# Altium PCB OSPLC2_2_IO.PcbDoc (part 1 of 2)
Units mm, origin at the board's own origin, x right, y up, seen from the top; angles counter-clockwise.
Board outline 156 x 86.5 mm, 2 copper layers (Top Layer, Bottom Layer); 296 components, 258 nets, 890 pads, 194 vias.
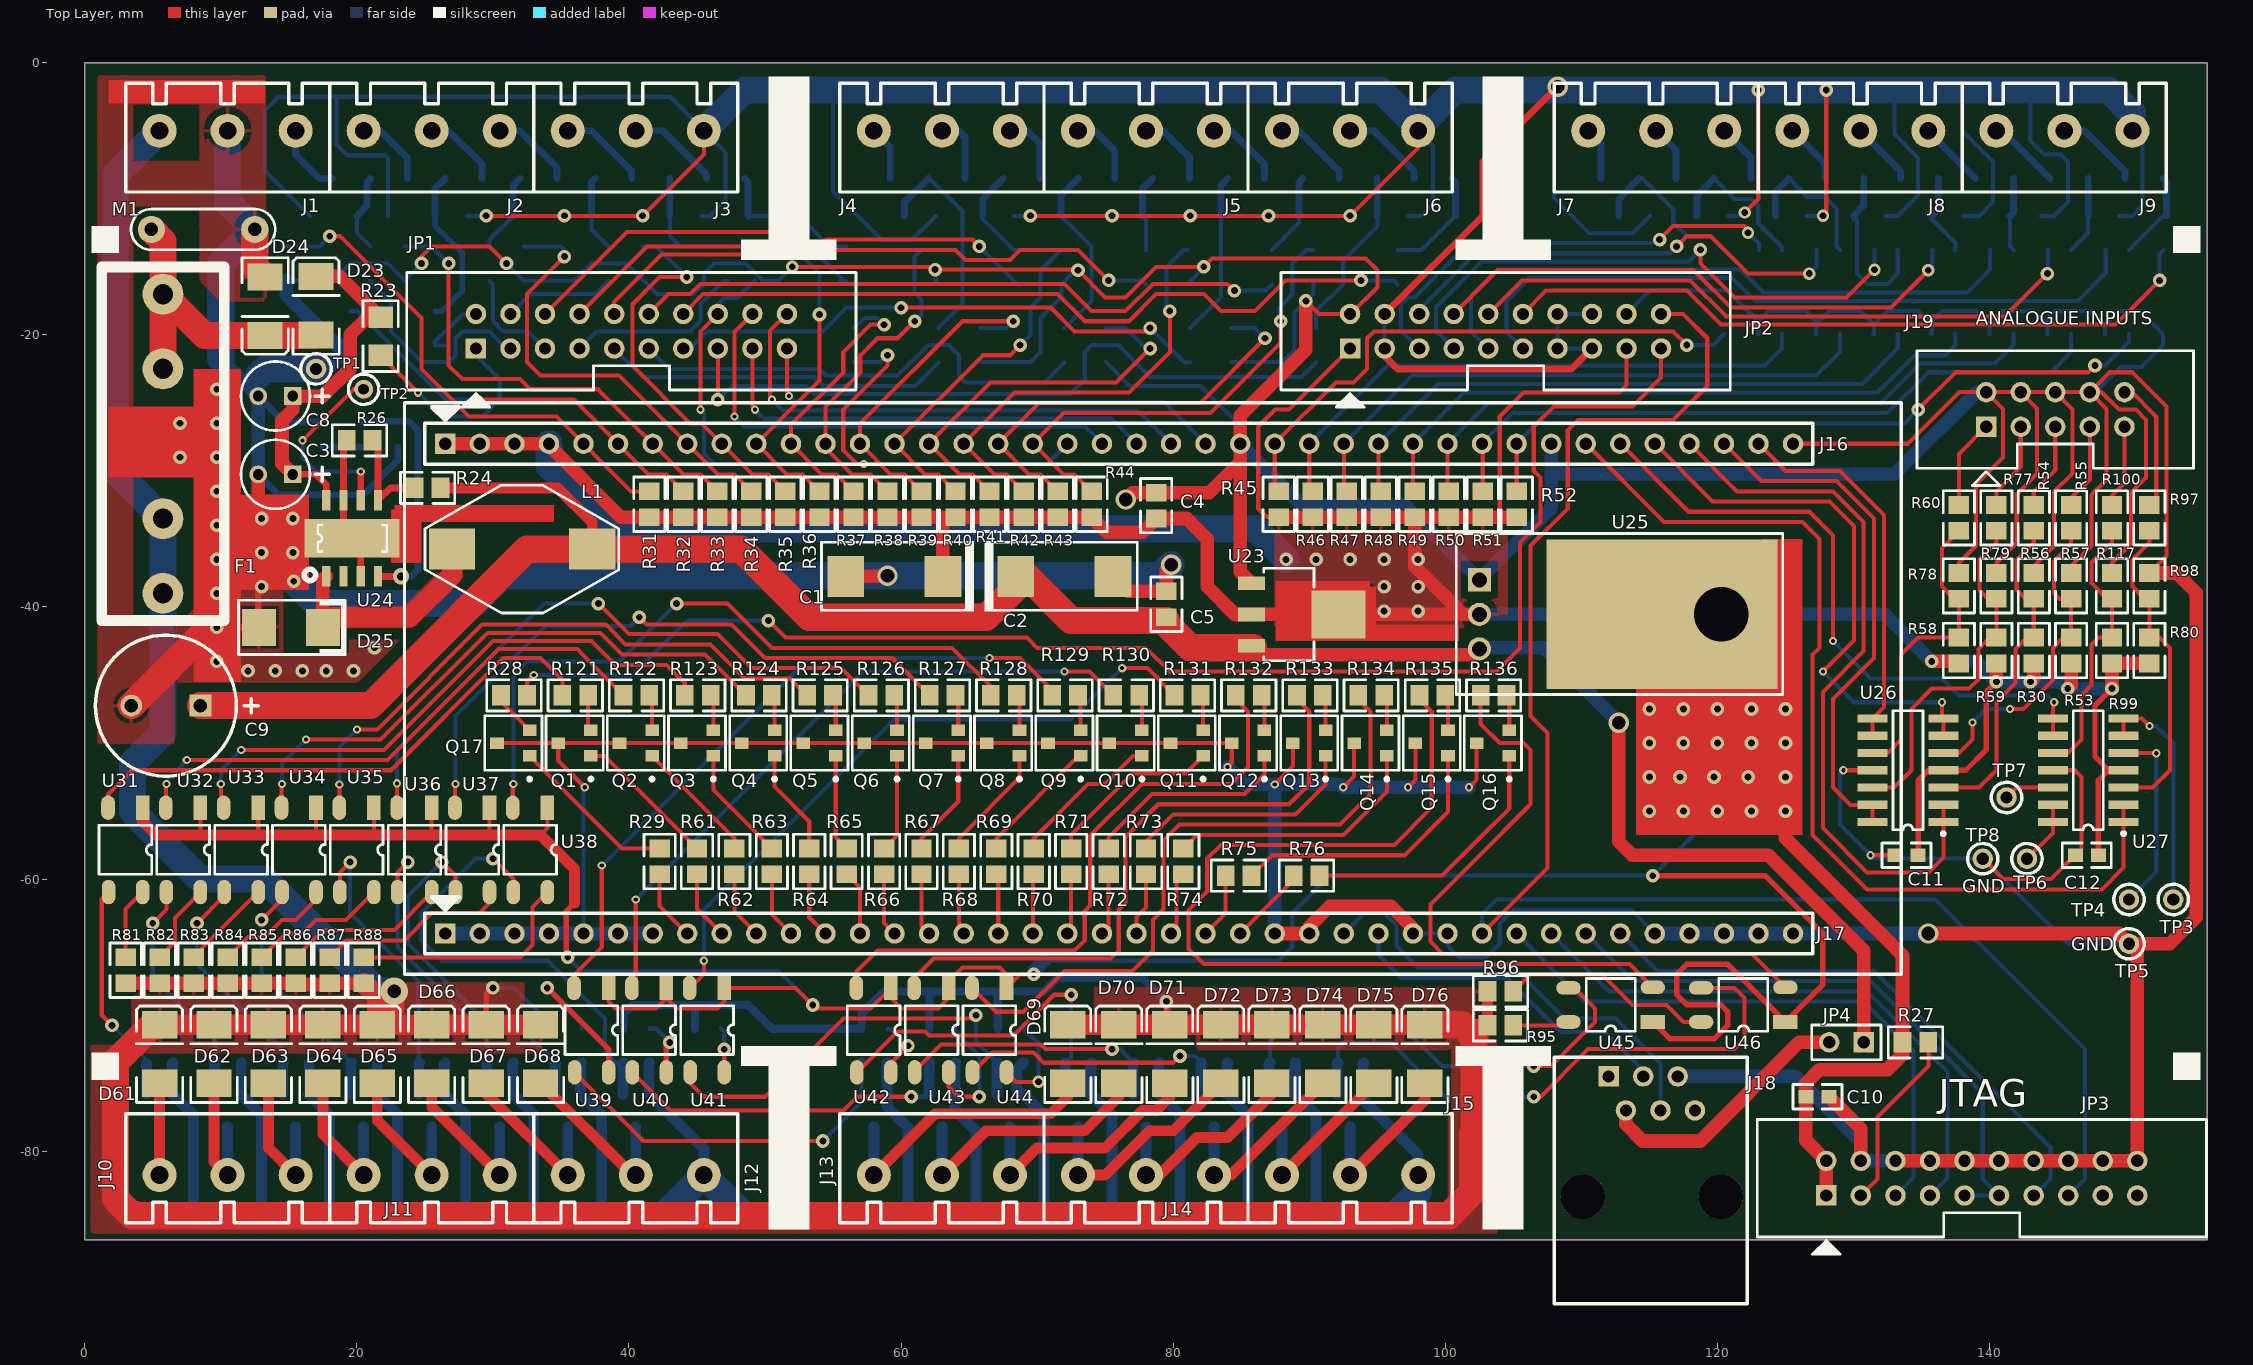
[diagram p0: Top Layer view]
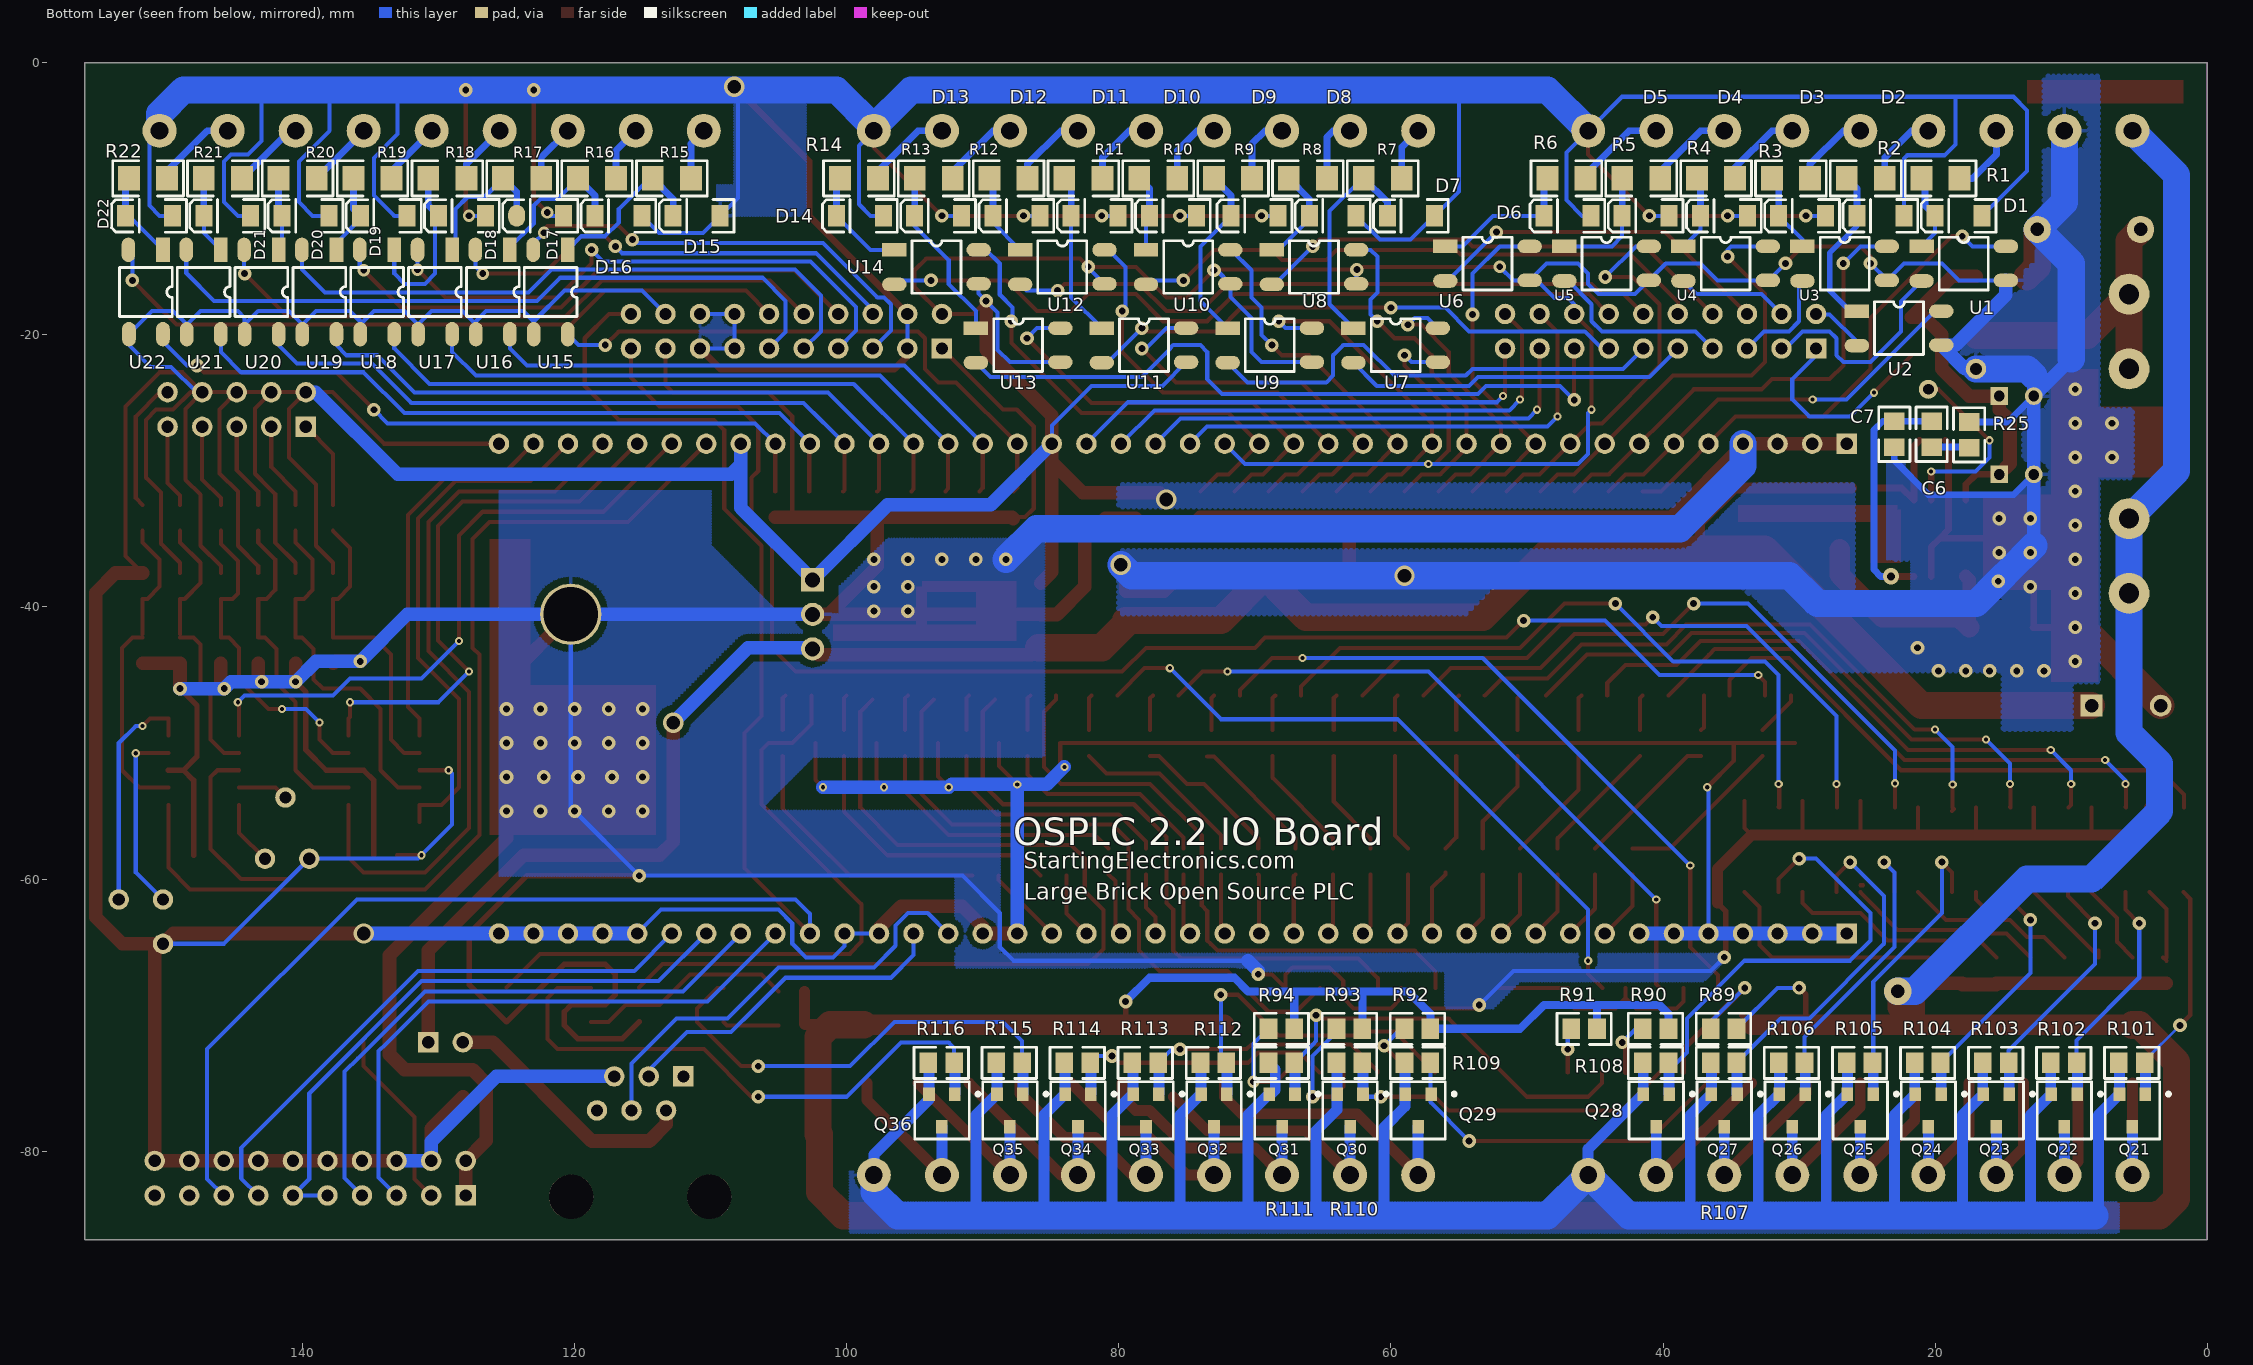
[diagram p1: Bottom Layer view, seen from below]

## Layer stack, top to bottom
Top Layer: signal copper 0.0356
Dielectric: dielectric 0.32, FR-4, Dk 4.8
Bottom Layer: signal copper 0.0356

## Board outline
0,-86.5 156,-86.5 156,0 0,0

## Design rules (kind name [scope] priority, off if disabled: settings)
Clearance [All] p1: gap=0.4
ComponentClearance [All] p1: gap=0.254 collisioncheckmode=0
HoleSize [All] p1: absolutevalues=TRUE maxlimit=5 minlimit=0.3 maxpercent=80.000 minpercent=20.000
PolygonConnect [All] p1: connectstyle=Relief reliefconductorwidth=0.254 reliefentries=4 polygonreliefangle="90 Angle"
RoutingLayers [All] p1: top layer=Horizontal bottom layer=Vertical
RoutingVias [All] p1: holewidth=0.5 width=1 viastyle="Through Hole" minholewidth=0.3 minwidth=0.6 maxholewidth=1.2 maxwidth=2
SolderMaskExpansion [All] p1: expansion=0.102
TestPointUsage [All] p1: valid=0 allowmultiple=FALSE
Testpoint [All] p1: side=15 testpointundercomponent=TRUE minsize=1.016 maxsize=2.54 preferedsize=1.524 minholesize=0 maxholesize=1.016 preferedholesize=0.813 testpointgrid=0.025 style=1023 order=-539222988
Width [All] p1: maxlimit=2 minlimit=0.2 preferedwidth=0.2 toplayer_prefwidth=0.3 bottomlayer_prefwidth=0.3 minimp=50.000000 maximp=50.000000 favimp=50.000000
15 further rules are at their usual default settings.

## Classes and differential pairs
component class OSPLC2_2_IO4: C11 C12 D73 D74 D75 D76 J14 J15 J19 Q13 Q14 Q15 Q16 Q33 Q34 Q35 Q36 R30 R53 R54 R55 R56 R57 R58 R59 R60 R73 R74 R75 R76 R77 R78 R79 R80 R93 R94 R95 R96 R97 R98 R99 R100 R113 R114 R115 R116 R117 R133 R134 R135 R136 TP3 TP4 TP5 TP6 TP7 TP8 U26 U27 U43 U44 U45 U46
component class OSPLC2_2_IO3: D61 D62 D63 D64 D65 D66 D67 D68 D69 D70 D71 D72 J10 J11 J12 J13 Q1 Q2 Q3 Q4 Q5 Q6 Q7 Q8 Q9 Q10 Q11 Q12 Q21 Q22 Q23 Q24 Q25 Q26 Q27 Q28 Q29 Q30 Q31 Q32 R61 R62 R63 R64 R65 R66 R67 R68 R69 R70 R71 R72 R81 R82 R83 R84 R85 R86 R87 R88 R89 R90 R91 R92 R101 R102 R103 R104 R105 R106 R107 R108 R109 R110 R111 R112 R121 R122 R123 R124 R125 R126 R127 R128 R129 R130 R131 R132 U31 U32 U33 U34 U35 U36 U37 U38 U39 U40 U41 U42
component class OSPLC2_2_IO2: C10 D18 D19 D20 D21 D22 J8 J9 J16 J17 J18 JP1 JP2 JP3 JP4 Q17 R18 R19 R20 R21 R22 R27 R28 R29 R48 R49 R50 R51 R52 U18 U19 U20 U21 U22
component class OSPLC2_2_IO1: C1 C2 C3 C4 C5 C6 C7 C8 C9 D1 D2 D3 D4 D5 D6 D7 D8 D9 D10 D11 D12 D13 D14 D15 D16 D17 D23 D24 D25 F1 J1 J2 J3 J4 J5 J6 J7 L1 M1 R1 R2 R3 R4 R5 R6 R7 R8 R9 R10 R11 R12 R13 R14 R15 R16 R17 R23 R24 R25 R26 R31 R32 R33 R34 R35 R36 R37 R38 R39 R40 R41 R42 R43 R44 R45 R46 R47 TP1 TP2 U1 U2 U3 U4 U5 U6 U7 U8 U9 U10 U11 U12 U13 U14 U15 U16 U17 U23 U24 U25

## Components (designator, comment, footprint, x,y, rotation, side; value= is the part's Value field where it differs from the comment)
C1 "Tant_D" CAP_TANT_D 59.5,-37.75 r0 top
C2 "Tant_D" CAP_TANT_D 72,-37.75 r180 top
C3 "CAP_100_RP" CAP_100_RP 12.75,-30.25 r0 top
C4 "0805" 0805 78.75,-33.5 r90 top
C5 "0805" 0805 79.5,-40.75 r90 top
C6 "0805" 0805 20.25,-28.25 r90 bottom
C7 "0805" 0805 23,-28.25 r90 bottom
C8 "63V" CAP_100_RP 12.75,-24.5 r0 top
C9 "CAP_200_RP" CAP_200_RP 8.5,-47.25 r180 top
C10 "0603" 0603 126.5,-76 r0 top
C11 "0603" 0603 134.75,-58.25 r180 top
C12 "0603" 0603 148,-58.25 r180 top
D1 "SM4148" MELF-R2/X1.6#1 20,-11.25 r90 bottom
D2 "SM4148" MELF-R2/X1.6#1 25.75,-11.25 r90 bottom
D3 "SM4148" MELF-R2/X1.6#1 31.5,-11.25 r90 bottom
D4 "SM4148" MELF-R2/X1.6#1 37.25,-11.25 r90 bottom
D5 "SM4148" MELF-R2/X1.6#1 43,-11.25 r90 bottom
D6 "SM4148" MELF-R2/X1.6#1 48.75,-11.25 r90 bottom
D7 "SM4148" MELF-R2/X1.6#1 60.25,-11.25 r90 bottom
D8 "SM4148" MELF-R2/X1.6#1 66,-11.25 r90 bottom
D9 "SM4148" MELF-R2/X1.6#1 71.75,-11.25 r90 bottom
D10 "SM4148" MELF-R2/X1.6#1 77.75,-11.25 r90 bottom
D11 "SM4148" MELF-R2/X1.6#1 83.5,-11.25 r90 bottom
D12 "SM4148" MELF-R2/X1.6#1 89.25,-11.25 r90 bottom
D13 "SM4148" MELF-R2/X1.6#1 95,-11.25 r90 bottom
D14 "SM4148" MELF-R2/X1.6#1 100.75,-11.25 r90 bottom
D15 "SM4148" MELF-R2/X1.6#1 112.75,-11.25 r90 bottom
D16 "SM4148" MELF-R2/X1.6#1 118.5,-11.25 r90 bottom
D17 "SM4148" MELF-R2/X1.6#2 124.25,-11.25 r90 bottom
D18 "SM4148" MELF-R2/X1.6#1 130,-11.25 r90 bottom
D19 "SM4148" MELF-R2/X1.6#1 135.75,-11.25 r90 bottom
D20 "SM4148" MELF-R2/X1.6#1 141.5,-11.25 r90 bottom
D21 "SM4148" MELF-R2/X1.6#1 147.25,-11.25 r90 bottom
D22 "SM4148" MELF-R2/X1.6#1 153,-11.25 r90 bottom
D23 "SM4007" MELF-2.2x2.5 17,-15.5 r0 top
D24 "SM4007" MELF-2.2x2.5 13.25,-20.25 r180 top
D25 "STPS340U" STPS2L25U 17.5,-41.5 r180 top
D61 "SM4007" MELF-2.2x2.5 5.5,-70.5 r0 top
D62 "SM4007" MELF-2.2x2.5 9.5,-70.5 r0 top
D63 "SM4007" MELF-2.2x2.5 13.5,-70.5 r0 top
D64 "SM4007" MELF-2.2x2.5 17.5,-70.5 r0 top
D65 "SM4007" MELF-2.2x2.5 21.5,-70.5 r0 top
D66 "SM4007" MELF-2.2x2.5 25.5,-70.5 r0 top
D67 "SM4007" MELF-2.2x2.5 29.5,-70.5 r0 top
D68 "SM4007" MELF-2.2x2.5 33.5,-70.5 r0 top
D69 "SM4007" MELF-2.2x2.5 72.25,-70.5 r0 top
D70 "SM4007" MELF-2.2x2.5 76,-70.5 r0 top
D71 "SM4007" MELF-2.2x2.5 79.75,-70.5 r0 top
D72 "SM4007" MELF-2.2x2.5 83.5,-70.5 r0 top
D73 "SM4007" MELF-2.2x2.5 87.25,-70.5 r0 top
D74 "SM4007" MELF-2.2x2.5 91,-70.5 r0 top
D75 "SM4007" MELF-2.2x2.5 94.75,-70.5 r0 top
D76 "SM4007" MELF-2.2x2.5 98.5,-70.5 r0 top
F1 "FUSE" FUSE_MULT 5.75,-39 r90 top
J1 "PCB TERMINAL" TERMINAL_3WAY_5MM 15.5,-5 r180 top
J2 "PCB TERMINAL" TERMINAL_3WAY_5MM 30.5,-5 r180 top
J3 "PCB TERMINAL" TERMINAL_3WAY_5MM 45.5,-5 r180 top
J4 "PCB TERMINAL" TERMINAL_3WAY_5MM 68,-5 r180 top
J5 "PCB TERMINAL" TERMINAL_3WAY_5MM 83,-5 r180 top
J6 "PCB TERMINAL" TERMINAL_3WAY_5MM 98,-5 r180 top
J7 "PCB TERMINAL" TERMINAL_3WAY_5MM 120.5,-5 r180 top
J8 "PCB TERMINAL" TERMINAL_3WAY_5MM 135.5,-5 r180 top
J9 "PCB TERMINAL" TERMINAL_3WAY_5MM 150.5,-5 r180 top
J10 "PCB TERMINAL" TERMINAL_3WAY_5MM 5.5,-81.75 r0 top
J11 "PCB TERMINAL" TERMINAL_3WAY_5MM 20.5,-81.75 r0 top
J12 "PCB TERMINAL" TERMINAL_3WAY_5MM 35.5,-81.75 r0 top
J13 "PCB TERMINAL" TERMINAL_3WAY_5MM 58,-81.75 r0 top
J14 "PCB TERMINAL" TERMINAL_3WAY_5MM 73,-81.75 r0 top
J15 "PCB TERMINAL" TERMINAL_3WAY_5MM 88,-81.75 r0 top
J16 "HEADER 1 x 40" HEADER_1_40 26.5,-28 r0 top locked
J17 "HEADER 1 x 40" HEADER_1_40 26.5,-64 r0 top locked
J18 "RJ12" RJ-12-95001-2661 112,-77 r0 top
J19 "IDC10M" IDC_10M_BOX 139.75,-26.75 r180 top
JP1 "IDC20M" IDC_20M_BOX 28.75,-21 r180 top
JP2 "IDC20M" IDC_20M_BOX 93,-21 r180 top
JP3 "IDC20M" IDC_20M_BOX 128,-83.25 r180 top
JP4 "JUMPER2" JUMPER2_254 130.75,-72 r180 top
L1 "SSL0804T" SSL0804 27,-35.75 r0 top
M1 "33V DC MOV" MOV_7.6mm 12.5,-12.25 r180 top
Q1 "BC807-40" SO-G3/Y1 36,-50 r90 top
Q2 "BC807-40" SO-G3/Y1 40.5,-50 r90 top
Q3 "BC807-40" SO-G3/Y1 45,-50 r90 top
Q4 "BC807-40" SO-G3/Y1 49.5,-50 r90 top
Q5 "BC807-40" SO-G3/Y1 54,-50 r90 top
Q6 "BC807-40" SO-G3/Y1 58.5,-50 r90 top
Q7 "BC807-40" SO-G3/Y1 63,-50 r90 top
Q8 "BC807-40" SO-G3/Y1 67.5,-50 r90 top
Q9 "BC807-40" SO-G3/Y1 72,-50 r90 top
Q10 "BC807-40" SO-G3/Y1 76.5,-50 r90 top
Q11 "BC807-40" SO-G3/Y1 81,-50 r90 top
Q12 "BC807-40" SO-G3/Y1 85.5,-50 r90 top
Q13 "BC807-40" SO-G3/Y1 90,-50 r90 top
Q14 "BC807-40" SO-G3/Y1 94.5,-50 r90 top
Q15 "BC807-40" SO-G3/Y1 99,-50 r90 top
Q16 "BC807-40" SO-G3/Y1 103.5,-50 r90 top
Q17 "BC807-40" SO-G3/Y1 31.5,-50 r90 top
Q21 "BC817-40" SO-G3/Y1 5.5,-77 r0 bottom
Q22 "BC817-40" SO-G3/Y1 10.5,-77 r0 bottom
Q23 "BC817-40" SO-G3/Y1 15.5,-77 r0 bottom
Q24 "BC817-40" SO-G3/Y1 20.5,-77 r0 bottom
Q25 "BC817-40" SO-G3/Y1 25.5,-77 r0 bottom
Q26 "BC817-40" SO-G3/Y1 30.5,-77 r0 bottom
Q27 "BC817-40" SO-G3/Y1 35.5,-77 r0 bottom
Q28 "BC817-40" SO-G3/Y1 40.5,-77 r0 bottom
Q29 "BC817-40" SO-G3/Y1 58,-77 r0 bottom
Q30 "BC817-40" SO-G3/Y1 63,-77 r0 bottom
Q31 "BC817-40" SO-G3/Y1 68,-77 r0 bottom
Q32 "BC817-40" SO-G3/Y1 73,-77 r0 bottom
Q33 "BC817-40" SO-G3/Y1 78,-77 r0 bottom
Q34 "BC817-40" SO-G3/Y1 83,-77 r0 bottom
Q35 "BC817-40" SO-G3/Y1 88,-77 r0 bottom
Q36 "BC817-40" SO-G3/Y1 93,-77 r0 bottom
R1 "1206" 1206 21,-8.5 r180 bottom
R2 "1206" 1206 26.5,-8.5 r180 bottom
R3 "1206" 1206 32,-8.5 r180 bottom
R4 "1206" 1206 37.5,-8.5 r180 bottom
R5 "1206" 1206 43,-8.5 r180 bottom
R6 "1206" 1206 48.5,-8.5 r180 bottom
R7 "1206" 1206 62,-8.5 r180 bottom
R8 "1206" 1206 67.5,-8.5 r180 bottom
R9 "1206" 1206 73,-8.5 r180 bottom
R10 "1206" 1206 78.5,-8.5 r180 bottom
R11 "1206" 1206 84,-8.5 r180 bottom
R12 "1206" 1206 89.5,-8.5 r180 bottom
R13 "1206" 1206 95,-8.5 r180 bottom
R14 "1206" 1206 100.5,-8.5 r180 bottom
R15 "1206" 1206 114.25,-8.5 r180 bottom
R16 "1206" 1206 119.75,-8.5 r180 bottom
R17 "1206" 1206 125.25,-8.5 r180 bottom
R18 "1206" 1206 130.75,-8.5 r180 bottom
R19 "1206" 1206 136.25,-8.5 r180 bottom
R20 "1206" 1206 141.75,-8.5 r180 bottom
R21 "1206" 1206 147.25,-8.5 r180 bottom
R22 "1206" 1206 152.75,-8.5 r180 bottom
R23 "1206" 1206 21.75,-21.5 r90 top
R24 "0805" 0805 24.25,-31.25 r0 top
R25 "0805" 0805 17.5,-26.4 r270 bottom
R26 "0805" 0805 19.25,-27.75 r0 top
R27 "0805" 0805 135.5,-72 r180 top
R28 "0805" 0805 32.5,-46.5 r180 top
R29 "0805" 0805 42.25,-57.75 r270 top
R30 "0805" 0805 143.25,-42.25 r270 top
R31 "0805" 0805 41.5,-31.5 r270 top
R32 "0805" 0805 44,-31.5 r270 top
R33 "0805" 0805 46.5,-31.5 r270 top
R34 "0805" 0805 49,-31.5 r270 top
R35 "0805" 0805 51.5,-31.5 r270 top
R36 "0805" 0805 54,-31.5 r270 top
R37 "0805" 0805 56.5,-31.5 r270 top
R38 "0805" 0805 59,-31.5 r270 top
R39 "0805" 0805 61.5,-31.5 r270 top
R40 "0805" 0805 64,-31.5 r270 top
R41 "0805" 0805 66.5,-31.5 r270 top
R42 "0805" 0805 69,-31.5 r270 top
R43 "0805" 0805 71.5,-31.5 r270 top
R44 "0805" 0805 74,-31.5 r270 top
R45 "0805" 0805 87.75,-31.5 r270 top
R46 "0805" 0805 90.25,-31.5 r270 top
R47 "0805" 0805 92.75,-31.5 r270 top
R48 "0805" 0805 95.25,-31.5 r270 top
R49 "0805" 0805 97.75,-31.5 r270 top
R50 "0805" 0805 100.25,-31.5 r270 top
R51 "0805" 0805 102.75,-31.5 r270 top
R52 "0805" 0805 105.25,-31.5 r270 top
R53 "0805" 0805 146,-42.25 r270 top
R54 "0805" 0805 143.25,-32.5 r270 top
R55 "0805" 0805 146,-32.5 r270 top
R56 "0805" 0805 143.25,-37.5 r270 top
R57 "0805" 0805 146,-37.5 r270 top
R58 "0805" 0805 137.75,-42.25 r270 top
R59 "0805" 0805 140.5,-42.25 r270 top
R60 "0805" 0805 137.75,-32.5 r270 top
R61 "0805" 0805 45,-57.75 r270 top
R62 "0805" 0805 47.75,-57.75 r270 top
R63 "0805" 0805 50.5,-57.75 r270 top
R64 "0805" 0805 53.25,-57.75 r270 top
R65 "0805" 0805 56,-57.75 r270 top
R66 "0805" 0805 58.75,-57.75 r270 top
R67 "0805" 0805 61.5,-57.75 r270 top
R68 "0805" 0805 64.25,-57.75 r270 top
R69 "0805" 0805 67,-57.75 r270 top
R70 "0805" 0805 69.75,-57.75 r270 top
R71 "0805" 0805 72.5,-57.75 r270 top
R72 "0805" 0805 75.25,-57.75 r270 top
R73 "0805" 0805 78,-57.75 r270 top
R74 "0805" 0805 80.75,-57.75 r270 top
R75 "0805" 0805 85.75,-59.75 r180 top
R76 "0805" 0805 90.75,-59.75 r180 top
R77 "0805" 0805 140.5,-32.5 r270 top
R78 "0805" 0805 137.75,-37.5 r270 top
R79 "0805" 0805 140.5,-37.5 r270 top
R80 "0805" 0805 151.75,-42.25 r270 top
R81 "0805" 0805 3,-65.75 r270 top
R82 "0805" 0805 5.5,-65.75 r270 top
R83 "0805" 0805 8,-65.75 r270 top
R84 "0805" 0805 10.5,-65.75 r270 top
R85 "0805" 0805 13,-65.75 r270 top
R86 "0805" 0805 15.5,-65.75 r270 top
R87 "0805" 0805 18,-65.75 r270 top
R88 "0805" 0805 20.5,-65.75 r270 top
R89 "0805" 0805 36.5,-71 r180 bottom
R90 "0805" 0805 41.5,-71 r180 bottom
R91 "0805" 0805 46.75,-71 r180 bottom
R92 "0805" 0805 59,-71 r180 bottom
R93 "0805" 0805 64,-71 r180 bottom
R94 "0805" 0805 69,-71 r180 bottom
R95 "0805" 0805 105,-70.75 r180 top
R96 "0805" 0805 105,-68.25 r180 top
R97 "0805" 0805 151.75,-32.5 r270 top
R98 "0805" 0805 151.75,-37.5 r270 top
R99 "0805" 0805 149,-42.25 r270 top
R100 "0805" 0805 149,-32.5 r270 top
R101 "0805" 0805 6.5,-73.5 r180 bottom
R102 "0805" 0805 11.5,-73.5 r180 bottom
R103 "0805" 0805 16.5,-73.5 r180 bottom
R104 "0805" 0805 21.5,-73.5 r180 bottom
R105 "0805" 0805 26.5,-73.5 r180 bottom
R106 "0805" 0805 31.5,-73.5 r180 bottom
R107 "0805" 0805 36.5,-73.5 r180 bottom
R108 "0805" 0805 41.5,-73.5 r180 bottom
R109 "0805" 0805 59,-73.5 r180 bottom
R110 "0805" 0805 64,-73.5 r180 bottom
R111 "0805" 0805 69,-73.5 r180 bottom
R112 "0805" 0805 74,-73.5 r180 bottom
R113 "0805" 0805 79,-73.5 r180 bottom
R114 "0805" 0805 84,-73.5 r180 bottom
R115 "0805" 0805 89,-73.5 r180 bottom
R116 "0805" 0805 94,-73.5 r180 bottom
R117 "0805" 0805 149,-37.5 r270 top
R121 "0805" 0805 37,-46.5 r180 top
R122 "0805" 0805 41.5,-46.5 r180 top
R123 "0805" 0805 46,-46.5 r180 top
R124 "0805" 0805 50.5,-46.5 r180 top
R125 "0805" 0805 55,-46.5 r180 top
R126 "0805" 0805 59.5,-46.5 r180 top
R127 "0805" 0805 64,-46.5 r180 top
R128 "0805" 0805 68.5,-46.5 r180 top
R129 "0805" 0805 73,-46.5 r180 top
R130 "0805" 0805 77.5,-46.5 r180 top
R131 "0805" 0805 82,-46.5 r180 top
R132 "0805" 0805 86.5,-46.5 r180 top
R133 "0805" 0805 91,-46.5 r180 top
R134 "0805" 0805 95.5,-46.5 r180 top
R135 "0805" 0805 100,-46.5 r180 top
R136 "0805" 0805 104.5,-46.5 r180 top
TP1 "TEST POINT" TEST_POINT_TH#1 17,-22.5 r0 top
TP2 "TEST POINT" TEST_POINT_TH#2 20.5,-24 r0 top
TP3 "TEST POINT" TEST_POINT_TH#1 153.5,-61.5 r0 top
TP4 "TEST POINT" TEST_POINT_TH#1 150.25,-61.5 r0 top
TP5 "TEST POINT" TEST_POINT_TH#1 150.25,-64.75 r0 top
TP6 "TEST POINT" TEST_POINT_TH#1 142.75,-58.5 r0 top
TP7 "TEST POINT" TEST_POINT_TH#1 141.25,-54 r0 top
TP8 "TEST POINT" TEST_POINT_TH#1 139.5,-58.5 r0 top
U1 "TLP181" SOP4_2.54 21,-13.5 r180 bottom
U2 "TLP181" SOP4_2.54 25.75,-18.25 r180 bottom
U3 "TLP181" SOP4_2.54 29.75,-13.5 r180 bottom
U4 "TLP181" SOP4_2.54 38.5,-13.5 r180 bottom
U5 "TLP181" SOP4_2.54 47.25,-13.5 r180 bottom
U6 "TLP181" SOP4_2.54 56,-13.5 r180 bottom
U7 "TLP181" SOP4_2.54 62.75,-19.5 r180 bottom
U8 "TLP181" SOP4_2.54 68.75,-13.75 r180 bottom
U9 "TLP181" SOP4_2.54 72,-19.5 r180 bottom
U10 "TLP181" SOP4_2.54 78,-13.75 r180 bottom
U11 "TLP181" SOP4_2.54 81.25,-19.5 r180 bottom
U12 "TLP181" SOP4_2.54 87.25,-13.75 r180 bottom
U13 "TLP181" SOP4_2.54 90.5,-19.5 r180 bottom
U14 "TLP181" SOP4_2.54 96.5,-13.75 r180 bottom
U15 "TLP181" SOP4_2.54 120.5,-13.75 r270 bottom
U16 "TLP181" SOP4_2.54 124.75,-13.75 r270 bottom
U17 "TLP181" SOP4_2.54 129,-13.75 r270 bottom
U18 "TLP181" SOP4_2.54 133.25,-13.75 r270 bottom
U19 "TLP181" SOP4_2.54 137.5,-13.75 r270 bottom
U20 "TLP181" SOP4_2.54 141.75,-13.75 r270 bottom
U21 "TLP181" SOP4_2.54 146,-13.75 r270 bottom
U22 "TLP181" SOP4_2.54 150.25,-13.75 r270 bottom
U23 "LD1117S33" SOT-223 85.75,-38.25 r270 top
U24 "L5973D" HSOP8 17.75,-37.75 r90 top
U25 "LM1117T-3.3" TO-220_H 102.5,-38 r270 top
U26 "MC33204DR2" SO-G14 134,-52 r90 top
U27 "MC33204DR2" SO-G14 147.25,-52 r90 top
U31 "TLP181" SOP4_2.54 4.25,-54.75 r270 top
U32 "TLP181" SOP4_2.54 8.5,-54.75 r270 top
U33 "TLP181" SOP4_2.54 12.75,-54.75 r270 top
U34 "TLP181" SOP4_2.54 17,-54.75 r270 top
U35 "TLP181" SOP4_2.54 21.25,-54.75 r270 top
U36 "TLP181" SOP4_2.54 25.5,-54.75 r270 top
U37 "TLP181" SOP4_2.54 29.75,-54.75 r270 top
U38 "TLP181" SOP4_2.54 34,-54.75 r270 top
U39 "TLP181" SOP4_2.54 38.5,-68 r270 top
U40 "TLP181" SOP4_2.54 42.75,-68 r270 top
U41 "TLP181" SOP4_2.54 47,-68 r270 top
U42 "TLP181" SOP4_2.54 59.25,-68 r270 top
U43 "TLP181" SOP4_2.54 63.5,-68 r270 top
U44 "TLP181" SOP4_2.54 67.75,-68 r270 top
U45 "TLP181" SOP4_2.54 115.25,-70.5 r180 top
U46 "TLP181" SOP4_2.54 125,-70.5 r180 top

## Footprints (in the part's own frame and the unit in brackets; to place one, negate y for a bottom-side part, rotate by r counter-clockwise, add the part's x,y. Pads: shape width x height; smd on the part's side, far side on the other; paste and mask are expansions set on the pad)
0603 [mm]
  rect 1.1x1 smd: 1(0,0) 2(1.7,0)
  silkscreen extent -0.95,-0.9 2.65,0.9
0805 [mm]
  rect 1.3x1.5 smd: 1(0,0) 2(1.9,0)
  silkscreen extent -1.05,-1.15 2.95,1.15
1206 [mm]
  rect 1.6x1.8 smd: 1(0,0) 2(2.8,0)
  silkscreen extent -1.2,-1.3 4,1.3
CAP_100_RP [mm]
  rect 1.3x1.3 hole 0.8: 1(2.54,0)
  round 1.3 hole 0.8: 2(0,0)
  silkscreen extent -1.27,-2.54 5.21,2.54
CAP_200_RP [mm]
  rect 1.6x1.6 hole 1: 1(0,0)
  round 1.6 hole 1: 2(5.08,0)
  silkscreen extent -4.25,-5.18 7.72,5.18
CAP_TANT_D [mm]
  rect 2.7x3 smd: 1(3.575,0) 2(-3.575,0)
  silkscreen extent -5.35,-2.6 5.87,2.6
FUSE_MULT [mm] "Fuse footprint for fuse holder or fuse clips"
  round 3 hole 1.5: 1(0,0) 2(22,0) 3(5.5,0) 4(16.5,0)
  silkscreen extent -2,-4.5 24,4.5
HEADER_1_40 [mm] "2.54mm HEADER 1 x 40"
  rect 1.5x1.5 hole 0.9: 1(0,0)
  round 1.5 hole 0.9: 2(2.54,0) 3(5.08,0) 4(7.62,0) 5(10.16,0) 6(12.7,0) 7(15.24,0) 8(17.78,0) 9(20.32,0) 10(22.86,0) 11(25.4,0) 12(27.94,0) 13(30.48,0) 14(33.02,0) 15(35.56,0) 16(38.1,0) 17(40.64,0) 18(43.18,0) 19(45.72,0) 20(48.26,0) 21(50.8,0) 22(53.34,0) 23(55.88,0) 24(58.42,0) 25(60.96,0) 26(63.5,0) 27(66.04,0) 28(68.58,0) 29(71.12,0) 30(73.66,0) 31(76.2,0) 32(78.74,0) 33(81.28,0) 34(83.82,0) 35(86.36,0) 36(88.9,0) 37(91.44,0) 38(93.98,0) 39(96.52,0) 40(99.06,0)
  silkscreen extent -1.5,-1.5 100.5,2.7
HSOP8 [mm]
  rect 1.5x0.6 smd: 1(0,0) 2(0,-1.27) 3(0,-2.54) 4(0,-3.81) 5(5.6,-3.81) 6(5.6,-2.54) 7(5.6,-1.27) 8(5.6,0)
  rect 2.8x7 smd: 9(2.8,-1.9)
  silkscreen extent -0.31,-4.44 3.8,1.62
IDC_10M_BOX [mm]
  rect 1.5x1.5 hole 0.9: 1(0,0)
  round 1.5 hole 0.9: 2(0,-2.54) 3(-2.54,0) 4(-2.54,-2.54) 5(-5.08,0) 6(-5.08,-2.54) 7(-7.62,0) 8(-7.62,-2.54) 9(-10.16,0) 10(-10.16,-2.54)
  silkscreen extent -15.24,-5.59 5.08,4.32
IDC_20M_BOX [mm]
  rect 1.5x1.5 hole 0.9: 1(0,0)
  round 1.5 hole 0.9: 2(0,-2.54) 3(-2.54,0) 4(-2.54,-2.54) 5(-5.08,0) 6(-5.08,-2.54) 7(-7.62,0) 8(-7.62,-2.54) 9(-10.16,0) 10(-10.16,-2.54) 11(-12.7,0) 12(-12.7,-2.54) 13(-15.24,0) 14(-15.24,-2.54) 15(-17.78,0) 16(-17.78,-2.54) 17(-20.32,0) 18(-20.32,-2.54) 19(-22.86,0) 20(-22.86,-2.54)
  silkscreen extent -27.94,-5.59 5.08,4.38
JUMPER2_254 [mm]
  rect 1.5x1.5 hole 0.9: 1(0,0)
  round 1.5 hole 0.9: 2(2.54,0)
  silkscreen extent -1.27,-1.27 3.81,1.27
MELF-2.2x2.5 [mm] "MELF (SMT diode, e.g. SM4007)"
  rect 2.6x2 smd: 1(0,-4.5) 2(0,-0.2)
  silkscreen extent -1.7,-5.93 1.7,1.17
MELF-R2/X1.6#1 [mm] "Mini Melf Diode"
  rect 1.6x1.25 smd: 1(0,-3.45) 2(0,0)
  silkscreen extent -1.2,-4.47 1.2,1.03
MELF-R2/X1.6#2 [mm] "Mini Melf Diode"
  rect 1.6x1.25 smd: 1(0,-3.45)
  oval 1.6x1.25 smd: 2(0,0)
  silkscreen extent -1.2,-4.47 1.2,1.03
MOV_7.6mm [mm]
  round 2 hole 1: 1(0,0) 2(7.6,0)
  silkscreen extent -1.5,-1.5 9.1,1.5
RJ-12-95001-2661 [mm] "RJ-12 Socket, Molex Part Number 95001-2661"
  round 3.25 hole 3.25 unplated: 0(-1.9,-6.35) 0(8.25,-6.35)
  rect 1.5x1.5 hole 0.9: 1(0,2.5)
  round 1.5 hole 0.9: 2(1.27,0) 3(2.54,2.5) 4(3.81,0) 5(5.08,2.5) 6(6.35,0)
  silkscreen extent -4,-14.2 10.2,3.9
SO-G3/Y1 [mm]
  rect 0.85x1 smd: 1(-0.95,-1.2) 2(0.95,-1.2) 3(0,1.2)
  silkscreen extent -2.77,-2.1 2,2.1
SO-G14 [mm]
  rect 0.6x2.2 smd: 1(-3.81,-2.6) 2(-2.54,-2.6) 3(-1.27,-2.6) 4(0,-2.6) 5(1.27,-2.6) 6(2.54,-2.6) 7(3.81,-2.6) 8(3.81,2.6) 9(2.54,2.6) 10(1.27,2.6) 11(0,2.6) 12(-1.27,2.6) 13(-2.54,2.6) 14(-3.81,2.6)
  silkscreen extent -4.78,-2.72 4.38,1.1
SOP4_2.54 [mm]
  rect 1.8x1 smd: 1(0,0)
  oval 1.8x1 smd: 3(0,-2.54) 4(6.2,-2.5) 6(6.2,0)
  silkscreen extent 1.3,-3.2 4.9,0.67
SOT-223 [mm] "SOT-223 package"
  rect 1x2 smd: 1(0,0) 2(2.3,0) 3(4.6,0)
  rect 3.5x4 smd: 4(2.3,6.4)
  silkscreen extent -1.1,0.9 5.7,4.6
SSL0804 [mm] "SMD Power Inductor,  Yageo"
  rect 3.4x3 smd: 1(0,0) 2(10.3,0)
  silkscreen extent -2,-4.7 12.25,4.7
STPS2L25U [mm] "Schottky Diode"
  rect 2.5x2.7 smd: 1(0,0) 2(4.7,0)
  silkscreen extent -1.65,-2 6.2,2
TERMINAL_3WAY_5MM [mm] "PCB Terminal, 3 pole, 5mm"
  round 2.5 hole 1.3: 1(0,0) 2(5,0) 3(10,0)
  silkscreen extent -2.5,-3.5 12.5,4.5
TEST_POINT_TH#1 [mm] "Through hole test point"
  round 1.5 hole 0.9: 1(0,0)
  silkscreen extent -1.11,-1.12 1.12,1.12
TEST_POINT_TH#2 [mm] "Through hole test point"
  round 1.4 hole 0.8: 1(0,0)
  silkscreen extent -1.11,-1.12 1.12,1.12
TO-220_H [mm]
  round 4.5 hole 4: 0(2.54,17.78)
  rect 1.7x1.7 hole 1.1: 1(0,0)
  round 1.7 hole 1.1: 2(2.54,0) 3(5.08,0)
  rect 11x17 smd: 4(2.525,13.425)
  silkscreen extent -3.4,-1.7 8.43,22.3

## Part data
C1 C2 C8: library part CAP_100_RP, "Electrolytic cap, 100 mil pitch"
C3: "Electrolytic cap, 100 mil pitch"
C4 C5 C6 C7: library part CAP_0805, "0805 footprint non-polarised capacitor"
C9: "Radial Electrolytic Capacitor, 200 thou pin spacing"
C10 C11 C12: library part CAP_0603, "0603 footprint non-polorised capacitor"
D1 D2 D3 D4 D5 D6 D7 D8 D9 D10 D11 D12 D13 D14 D15 D16 D17 D18 D19 D20 D21 D22: "SMT 1N4148 diode"
D23 D24 D61 D62 D63 D64 D65 D66 D67 D68 D69 D70 D71 D72 D73 D74 D75 D76: "1A, 1000V MELF Rectifier"
D25: "Power Schottky rectifier, ST"
F1: library part FUSE_MULTI, "Fuse holder or Fuse clips for 20mm fuse"
J1 J2 J3 J4 J5 J6 J7 J8 J9 J10 J11 J12 J13 J14 J15: library part TERMINAL_3WAY_5MM, "5mm spaced PCB terminal, 3 pole"
J16 J17: library part HEADER_1_40, "2.54mm header, 1 by 40"
J18: library part RJ-12-95001-2661, "RJ 12 Socket, Molex Part num. 95001-2661"
J19: library part IDC_10M, "10 pin IDC male connector, vertical, box"
JP1 JP2 JP3: library part IDC_20M, "20 pin IDC male connector, vertical, box"
JP4: "2 Pin Jumper, 2.54mm"
L1: "Yageo SMD Power Inductor"
M1: library part MOV_7.6MM, "Metal Oxide Varistor"
Q1 Q2 Q3 Q4 Q5 Q6 Q7 Q8 Q9 Q10 Q11 Q12 Q13 Q14 Q15 Q16 Q17: "PNP General Purpose Amplifier"
Q21 Q22 Q23 Q24 Q25 Q26 Q27 Q28 Q29 Q30 Q31 Q32 Q33 Q34 Q35 Q36: "NPN General Purpose Amplifier"
R1 R2 R3 R4 R5 R6 R7 R8 R9 R10 R11 R12 R13 R14 R15 R16 R17 R18 R19 R20 R21 R22 R23: library part RES_1206, "1206 footprint resistor"
R24 R25 R26 R27 R28 R29 R30 R31 R32 R33 R34 R35 R36 R37 R38 R39 R40 R41 R42 R43 R44 R45 R46 R47 R48 R49 R50 R51 R52 R53 R54 R55 R56 R57 R58 R59 R60 R61 R62 R63 R64 R65 R66 R67 R68 R69 R70 R71 R72 R73 R74 R75 R76 R77 R78 R79 R80 R81 R82 R83 R84 R85 R86 R87 R88 R89 R90 R91 R92 R93 R94 R95 R96 R97 R98 R99 R100 R101 R102 R103 R104 R105 R106 R107 R108 R109 R110 R111 R112 R113 R114 R115 R116 R117 R121 R122 R123 R124 R125 R126 R127 R128 R129 R130 R131 R132 R133 R134 R135 R136: library part RES_0805, "0805 footprint resistor"
TP1 TP2 TP3 TP4 TP5 TP6 TP7 TP8: library part TEST_POINT_TH, "Through hole test point"
U1 U2 U3 U4 U5 U6 U7 U8 U9 U10 U11 U12 U13 U14 U15 U16 U17 U18 U19 U20 U21 U22 U31 U32 U33 U34 U35 U36 U37 U38 U39 U40 U41 U42 U43 U44 U45 U46: "Toshiba Photocoupler"
U23: "ST 3.3V LDO regulator"
U24: "ST 2.5A switch step down switching regulator"
U25: library part LM1117T3.3_VERT, "3.3V Regulator, 800mA, Vertical Mounted"
U26 U27: "Rail-to-Rail Quad Operational Amplifier"

## Via types
v1: diameter 1, hole 0.5, Top Layer to Bottom Layer, 134 vias
v2: diameter 0.6, hole 0.3, Top Layer to Bottom Layer, 44 vias
v3: diameter 0.9, hole 0.5, Top Layer to Bottom Layer, 8 vias
v4: diameter 1.5, hole 1, Top Layer to Bottom Layer, 6 vias
v5: diameter 1.2, hole 0.6, Top Layer to Bottom Layer, 1 vias
v6: diameter 2, hole 1, Top Layer to Bottom Layer, 1 vias

## Nets (pads, with @x,y where several pads share a name; then routed paths per layer and width w, separated by ;. In a path a pad name is that pad's centre, name@x,y a point inside that pad or via, vN(x,y) a via of type N, cw(c..) or ccw(c..) an arc to the next point about the centre after c; other vN are vias at no path point)
AD1: J16.39 U26.8 U26.9 | length 28
  Top Layer w0.3: J16.39@123.02,-28 125.02,-30 129,-30 132.25,-33.25 132.25,-47.34 U26.8@131.4,-48.19 U26.9@131.4,-49.46
AD2: J16.38 U26.13 U26.14 | length 39
  Top Layer w0.3: J16.38@120.48,-28 123.23,-30.75 128.76,-30.75 131.5,-33.49 131.5,-43.75 128.5,-46.75 128.5,-53.25 129.79,-54.54 U26.13@131.4,-54.54 U26.14@131.4,-55.81
AD3: J16.37 U26.1 U26.2 | length 53.4
  Top Layer w0.3: J16.37@117.94,-28 121.44,-31.5 128.5,-31.5 130.75,-33.75 130.75,-43.25 127.75,-46.25 127.75,-56.25 131,-59.5 135.5,-59.5 136.6,-58.4 U26.2@136.6,-54.54
AD4: J16.36 U26.6 U26.7 | length 41
  Top Layer w0.3: J16.36@115.4,-28 119.65,-32.25 128.25,-32.25 130.05,-34.05 130.05,-42.45 128,-44.5 v2(127.75,-44.75) ; v2(136.5,-47) 136.5,-48.09 U26.7@136.6,-48.19 U26.6@136.6,-49.46
  Bottom Layer w0.3: v2(127.75,-44.75) 130,-47 v2(136.5,-47)
AD5: J16.35 U27.8 U27.9 | length 46.8
  Top Layer w0.3: J16.35@112.86,-28 117.86,-33 126.75,-33 128.5,-34.75 v2(128.5,-42.5) ; U27.9@144.65,-49.46 144.65,-47.1 v2(144.75,-47)
  Bottom Layer w0.3: v2(128.5,-42.5) 131.25,-45.25 136.5,-45.25 137.75,-46.5 144.25,-46.5 v2(144.75,-47)
AD6: J16.34 U27.1 U27.2 | length 71.8
  Top Layer w0.3: J16.34@110.32,-28 116.07,-33.75 126.25,-33.75 127.5,-35 127.5,-43 127,-43.5 127,-56.75 131,-60.75 148.25,-60.75 149.85,-59.15 U27.2@149.85,-54.54
AN1: J19.1 R60.1 | length 6.6
  Top Layer w0.3: R60.1@137.75,-32.5 137.75,-28.75 J19.1@139.75,-26.75
AN2: J19.3 R77.1 | length 6.5
  Top Layer w0.3: R77.1@140.5,-32.5 140.5,-31.5 142.29,-29.71 J19.3@142.29,-26.75
AN3: J19.5 R54.1 | length 6.4
  Top Layer w0.3: R54.1@143.25,-32.5 143.25,-31.5 144.83,-29.92 J19.5@144.83,-26.75
AN4: J19.7 R55.1 | length 6.3
  Top Layer w0.3: R55.1@146,-32.5 146,-32 147.37,-30.63 J19.7@147.37,-26.75
AN5: J19.9 R100.1 | length 6.1
  Top Layer w0.3: R100.1@149,-32.5 149,-31.81 149.91,-30.9 J19.9@149.91,-26.75
AN6: J19.10 R97.1 | length 9.8
  Top Layer w0.3: J19.10@149.91,-24.21 150.46,-24.21 152.25,-26 152.25,-32 R97.1@151.75,-32.5
DDM: J16.21 JP1.17 | length 33.7
  Top Layer w0.3: JP1.17@49.07,-21 49.07,-25.32 v2(49.25,-25.5)
  Bottom Layer w0.3: v2(49.25,-25.5) 49.9,-26.15 75.45,-26.15 J16.21@77.3,-28
DDP: J16.20 JP1.18 | length 35.9
  Top Layer w0.3: v2(47.75,-26) 47.75,-19.78 JP1.18@49.07,-18.46
  Bottom Layer w0.3: v2(47.75,-26) 48.5,-26.75 73.51,-26.75 J16.20@74.76,-28
GND: C1.2 C2.2 C3.2 C4.2 C5.2 C7.1 C8.2 C9.2 C10.2 C11.2 C12.2 D24.1 D25.2 J1.2 J16.19 J16.24 J16.33 J16.40 J17.1 J17.2 J17.3 J17.4 J17.5 J17.6 J17.7 J17.25 J17.26 J17.29 J17.30 J17.36 J17.37 J17.38 J17.39 J17.40 J18.5 J19.2 J19.4 J19.6 J19.8 JP1.16 JP2.2 JP2.18 JP3.4 JP3.6 JP3.8 JP3.10 JP3.12 JP3.14 JP3.16 JP3.18 JP3.20 M1.1 Q1.3 Q2.3 Q3.3 Q4.3 Q5.3 Q6.3 Q7.3 Q8.3 Q9.3 Q10.3 Q11.3 Q12.3 Q13.3 Q14.3 Q15.3 Q16.3 Q17.3 R25.1 R26.1 R56.1 R57.1 R78.1 R79.1 R98.1 R117.1 TP1.1 TP5.1 TP8.1 U1.4 U2.4 U3.4 U4.4 U5.4 U6.4 U7.4 U8.4 U9.4 U10.4 U11.4 U12.4 U13.4 U14.4 U15.4 U16.4 U17.4 U18.4 U19.4 U20.4 U21.4 U22.4 U23.1 U24.3 U24.7 U24.9 U25.1 U26.11 U27.11 | length 1012.3
  Top Layer w0.3: v1(24.75,-14.75) 24.75,-14.25 25.5,-13.5 29.75,-13.5 v1(31,-14.75) ; Q17.3@30.3,-50 Q12.3@84.3,-50 84.3,-51.45 v2(84,-51.75) ; Q1.3@34.8,-50 34.8,-51.3 v2(36.75,-53.25) ; v2(45.25,-25.5) 45.25,-22.25 45.25,-19.74 JP1.16@46.53,-18.46 ; v3(52,-15) 62.3,-15 v1(62.5,-15.2) 72.95,-15.2 75,-17.25 76.5,-17.25 78.75,-15 v1(82.25,-15) 82.85,-14.4 94.15,-14.4 95,-15.25 95,-16.5 93.04,-18.46 90.71,-18.46 v1(89.75,-17.5) ; v2(57.25,-29.5) 56.75,-29.5 55.75,-28.5 55.75,-25.5 59,-22.25 v1(59,-21.5) ; v1@62.5,-15 v1@62.6,-15.1 ; v2(87.46,-53.04) 88.8,-51.7 Q13.3@88.8,-50 ; v2(92.5,-53.25) 93.3,-52.45 Q14.3@93.3,-50 ; v2(97.25,-53.25) 97.8,-52.7 Q15.3@97.8,-50 ; J17.29@97.62,-64 J17.29@97.62,-63.62 ; v2(101.75,-53.25) 102.3,-52.7 Q16.3@102.3,-50 ; J16.40@125.56,-28 134,-28 137.79,-24.21 J19.4@142.29,-24.21 ; v2(129.25,-52) U26.11@131.4,-52 ; v2(131.25,-58.25) C11.2@133.05,-58.25 ; JP3.6@132.58,-80.71 133.29,-80.71 133.185,-80.815 JP3.6@133,-81 ; R78.1@137.75,-37.5 137.75,-36.75 139,-35.5 139,-31 141,-29 141,-25.46 J19.2@139.75,-24.21 ; TP8.1@139.5,-58.5 141,-60 144.5,-60 C12.2@145.75,-58.75 ; R79.1@140.5,-37.5 140.5,-36.75 142,-35.25 142,-31.707 142.457,-31.25 143.5,-30.207 143.5,-25.42 J19.4@142.29,-24.21 ; R56.1@143.25,-37.5 143.25,-37 144.75,-35.5 144.75,-31.525 146.1,-30.175 146.1,-25.48 J19.6@144.83,-24.21 ; U27.11@144.65,-52 146.25,-52 146.75,-52.5 146.75,-57.8 145.775,-58.775 ; R57.1@146,-37.5 146,-37 147.5,-35.5 147.5,-31.75 148.6,-30.65 148.6,-25.44 J19.8@147.37,-24.21 148.83,-22.75 150.5,-22.75 153,-25.25 153,-36.25 R98.1@151.75,-37.5 ; R117.1@149,-37.5 149,-36.75 150.048,-35.702 150.4,-35.35 150.4,-31.6 151.5,-30.5 151.5,-26.25 150.75,-25.5 149.5,-25.5 148.21,-24.21 J19.4@142.29,-24.21
  Top Layer w0.5: 9.17,-41.5 D25.2@12.8,-41.5 12.75,-41.45 12.75,-35.75 13.55,-34.95 U24.9@19.45,-34.95 ; R26.1@19.25,-27.75 19.02,-27.98 U24.7@19.02,-32.15 19.02,-34.32 U24.9@19.65,-34.95 20.29,-35.59 U24.3@20.29,-37.75
  Top Layer w1: 12.75,-35.25 C3.2@12.75,-30.25 ; C1.2@55.925,-37.75 58.95,-37.75 v4(59,-37.7) ; C2.2@75.575,-37.75 76.675,-38.85 C5.2@79.5,-38.85 79.5,-37.25 v4(79.847,-36.903) ; v4(76.5,-32.1) 77,-31.6 82.65,-31.6 84.92,-29.33 ; U23.1@85.75,-38.25 84.92,-37.42 J16.24@84.92,-28 84.92,-25.924 89.75,-21.094 v1(89.75,-17.5) ; J17.25@87.46,-64 J17.26@90,-64 90,-63.5 91.5,-62 96,-62 J17.29@97.62,-63.62 ; C10.2@128.2,-76 130.54,-78.34 JP3.4@130.54,-80.71 ; JP3.6@133.08,-80.71 JP3.20@150.86,-80.71 150.86,-65.36 149.5,-64 v4(135.5,-64) ; TP5.1@150.25,-64.75 153.25,-64.75 155.2,-62.8 155.2,-38.95 153.75,-37.5 R98.1@151.75,-37.5
  Top Layer w2: C9.2@3.42,-47.25 9.17,-41.5 ; M1.1@12.5,-12.25 12.5,-15 D24.1@13.25,-15.75
  Bottom Layer w0.3: U1.4@14.8,-16 18.25,-16 19.5,-14.75 22.3,-14.75 U3.4@23.55,-16 23.55,-15.95 v1(24.75,-14.75) ; U2.4@19.55,-20.75 U2.4@19.55,-20.55 ; v1(31,-14.75) 32.25,-16 36,-16 37.25,-14.75 39.8,-14.75 42.05,-17 44.75,-17 45.5,-16.25 45.5,-15.5 46.25,-14.75 48.55,-14.75 U6.4@49.8,-16 51,-16 v3(52,-15) ; J17.5@36.66,-64 36.66,-53.34 v2(36.75,-53.25) ; v2(45.25,-25.5) 45.5,-25.75 45.5,-28.75 46.25,-29.5 70.72,-29.5 J16.19@72.22,-28 ; JP1.16@46.53,-18.46 46.53,-17.72 46.968,-17.282 47.968,-17.282 U6.4@49.25,-16 ; U7.4@56.55,-22 58.5,-22 v1(59,-21.5) ; U8.4@62.5,-16.2 U8.4@62.55,-16.25 62.55,-15.25 v1(62.5,-15.2) ; U9.4@65.8,-22 69.5,-22 70.25,-21.25 70.25,-18.75 71.8,-17.2 U10.4@71.8,-16.25 72.8,-15.25 v1(73,-15.25) ; U11.4@75.05,-22 76.8,-23.75 82,-23.75 84.92,-26.67 J16.24@84.92,-28 ; U12.4@81.05,-16.25 82.25,-15.05 v1(82.25,-15) ; U13.4@84.3,-22 88,-22 88.9,-21.1 88.9,-18.35 v1(89.75,-17.5) 90.3,-16.95 U14.4@90.3,-16.25 ; J17.29@97.62,-64 J17.30@100.16,-64 100.16,-64.91 101,-65.75 103,-65.75 104,-64.75 104,-63.25 105,-62.25 113.65,-62.25 J17.36@115.4,-64 J17.36@115.4,-63.4 ; JP2.18@113.32,-18.46 115.03,-16.75 120.75,-16.75 123,-19 ; U15.4@123,-19.95 123,-19 ; U16.4@127.25,-19.95 127.25,-19 126.5,-18.25 123.75,-18.25 123,-19 ; U16.4@127.25,-19.25 128.25,-18.25 130.5,-18.25 U17.4@131.5,-19.25 ; v2(129.25,-52) 129,-52.25 129,-56 131.5,-58.5 TP8.1@139.5,-58.5 145.75,-64.75 TP5.1@150.25,-64.75 ; U17.4@131.45,-19.95 U17.4@131.5,-19.95 U17.4@131.5,-19.25 ; U18.4@135.75,-19.95 135.75,-19 136.5,-18.25 139,-18.25 U19.4@140,-19.25 ; U18.4@135.75,-19.25 134.75,-18.25 132.5,-18.25 U17.4@131.5,-19.25 ; U19.4@140,-19.95 U19.4@140,-19.25 ; J19.8@147.37,-24.21 147.79,-24.21 149.652,-22.348 151.152,-22.348 152.75,-20.75 U22.4@152.75,-19.95 151.05,-18.25 149.5,-18.25 U21.4@148.5,-19.25 ; U19.4@140,-19.25 141,-18.25 143.25,-18.25 144.25,-19.25 U20.4@144.25,-19.95 144.25,-18.75 144.75,-18.25 147.5,-18.25 U21.4@148.5,-19.25 ; U21.4@148.5,-19.25 U21.4@148.5,-19.95 U21.4@148.5,-19.25
  Bottom Layer w0.5: C3.2@12.75,-30.25 14.25,-31.75 20.5,-31.75 23,-29.25 C7.1@23,-28.25 ; C8.2@12.75,-24.5 14.65,-26.4 R25.1@17.5,-26.4
  Bottom Layer w1: 10,-21.75 C8.2@12.75,-24.5 ; 12.75,-35.5 12.75,-23 ; U1.4@14.8,-16 14.8,-17.05 18.5,-20.75 U2.4@19.55,-20.75 17.8,-22.5 TP1.1@17,-22.5 ; J17.1@26.5,-64 J17.7@41.74,-64 ; v2(84,-51.75) 85.29,-53.04 92.29,-53.04 v2(92.5,-53.25) v2(101.75,-53.25) ; J16.24@84.92,-28 89.42,-32.5 97,-32.5 U25.1@102.5,-38 107.78,-32.72 J16.33@107.78,-28 107.78,-29.53 108.5,-30.25 133,-30.25 139.04,-24.21 J19.2@139.75,-24.21 ; J17.25@87.46,-64 v2(87.46,-53.04) ; J17.36@115.4,-64 v4(135.5,-64) ; J18.5@117.08,-74.5 125.75,-74.5 130.54,-79.29 JP3.4@130.54,-80.71 JP3.6@133.08,-80.71
  Bottom Layer w2: 10,-21.75 10,-14.75 M1.1@12.5,-12.25 10.5,-10.25 J1.2@10.5,-5 ; 12.75,-35.5 13.125,-35.875 14.275,-37.025 v1(15.363,-38.113) 17,-39.75 28.65,-39.75 29.07,-39.33 30.7,-37.7 79.05,-37.7 v4(79.847,-36.903) ; 12.75,-23 13.25,-22.5 TP1.1@17,-22.5
  other v1: 12,-44.7 14,-44.7 16,-44.7 17.75,-44.7 19.75,-44.7 9.7,-44 21.3,-43 9.7,-41.5 9.7,-39 13,-38.5 9.7,-36.5 13,-36 15.3,-36 9.7,-34 13,-33.5 15.3,-33.5 9.7,-31.5 7,-29 9.7,-29 7,-26.5 9.7,-26.5 9.7,-24
I1: J16.5 R31.1 U1.6 | length 37
  Top Layer w0.3: v1(18,-12.75) 18.75,-12.75 24.75,-18.75 24.75,-22.5 28.25,-26 34.66,-26 40.16,-31.5 R31.1@41.5,-31.5
  Bottom Layer w0.3: U1.6@14.8,-13.5 17.25,-13.5 v1(18,-12.75)
I2: J16.6 R32.1 U2.6 | length 29.9
  Top Layer w0.3: v2(29,-24.75) 35.95,-24.75 41.45,-30.25 42.75,-30.25 R32.1@44,-31.5
  Bottom Layer w0.3: U2.6@19.55,-18.25 20,-18.25 26.5,-24.75 v2(29,-24.75)
I3: J16.7 R33.1 U3.6 | length 34.8
  Top Layer w0.3: v1(26.75,-14.75) 26.75,-22.25 27.75,-23.25 32,-23.25 32.75,-24 37.74,-24 43.99,-30.25 45.25,-30.25 R33.1@46.5,-31.5
  Bottom Layer w0.3: U3.6@23.55,-13.5 25.5,-13.5 v1(26.75,-14.75)
I4: J16.8 R34.1 U4.6 | length 32.9
  Top Layer w0.3: v1(35.25,-14.25) 32.5,-17 32.5,-22 33.5,-23 39.28,-23 46.53,-30.25 47.75,-30.25 R34.1@49,-31.5
  Bottom Layer w0.3: U4.6@32.3,-13.5 35,-13.5 35.25,-13.75 v1(35.25,-14.25)
I5: J16.9 R35.1 U5.6 | length 28.5
  Top Layer w0.3: v1(44.25,-15.75) 42.25,-15.75 40.25,-17.75 40.25,-22.25 44.5,-26.5 45.32,-26.5 49.07,-30.25 50.25,-30.25 R35.1@51.5,-31.5
  Bottom Layer w0.3: U5.6@41.05,-13.5 42,-13.5 v1(44.25,-15.75)
I6: J16.10 R36.1 U6.6 | length 25.5
  Top Layer w0.3: R36.1@54,-31.5 52.75,-30.25 51.61,-30.25 J16.10@49.36,-28 54,-23.36 v1(54,-18.5)
  Bottom Layer w0.3: U6.6@49.8,-13.5 52,-13.5 54,-15.5 v1(54,-18.5)
I7: J16.11 R37.1 U7.6 | length 20.9
  Top Layer w0.3: R37.1@56.5,-31.5 55.25,-30.25 54.15,-30.25 J16.11@51.9,-28 51.9,-26.6 55.75,-22.75 55.75,-21.25 57.75,-19.25 v1(58.75,-19.25)
  Bottom Layer w0.3: U7.6@56.55,-19.5 57.3,-18.75 58.25,-18.75 v1(58.75,-19.25)
I8: J16.12 R38.1 U8.6 | length 25.7
  Top Layer w0.3: R38.1@59,-31.5 57.75,-30.25 56.375,-30.25 54.44,-28.315 J16.12@54.44,-28 54.44,-25.31 57,-22.75 57,-21.5 58.25,-20.25 59.75,-20.25 v1(61,-19)
  Bottom Layer w0.3: v1(61,-19) 61.5,-18.5 61.5,-17.4 61,-16.9 61,-14.25 61.5,-13.75 U8.6@62.55,-13.75
I9: J16.13 R39.1 U9.6 | length 24.5
  Top Layer w0.3: R39.1@61.5,-31.5 60.25,-30.25 59.23,-30.25 J16.13@56.98,-28 56.98,-26.52 64.5,-19 v1(68.25,-19)
  Bottom Layer w0.3: U9.6@65.8,-19.5 67.75,-19.5 v1(68.25,-19)
I10: J16.14 R40.1 U10.6 | length 26.5
  Top Layer w0.3: R40.1@64,-31.5 62.75,-30.25 61.77,-30.25 J16.14@59.52,-28 66.02,-21.5 68,-21.5 v1(68.75,-20.75)
  Bottom Layer w0.3: v1(68.75,-20.75) 69.5,-20 69.5,-18 70.25,-17.25 70.25,-15.25 71.75,-13.75 U10.6@71.8,-13.75
I11: J16.15 R41.1 U11.6 | length 28.9
  Top Layer w0.3: R41.1@66.5,-31.5 65.25,-30.25 64.31,-30.25 J16.15@62.06,-28 66.56,-23.5 75.8,-23.5 v1(78.3,-21)
  Bottom Layer w0.3: U11.6@75.05,-19.5 76.5,-19.5 78,-21 v1(78.3,-21)
I12: J16.16 R42.1 U12.6 | length 32.2
  Top Layer w0.3: R42.1@69,-31.5 67.75,-30.25 66.85,-30.25 J16.16@64.6,-28 68.35,-24.25 76.75,-24.25 79.75,-21.25 v1(79.75,-18.25)
  Bottom Layer w0.3: v1(79.75,-18.25) 79.5,-18 79.5,-15 80.75,-13.75 U12.6@81.05,-13.75
I13: J16.17 R43.1 U13.6 | length 31.4
  Top Layer w0.3: R43.1@71.5,-31.5 70.25,-30.25 69.39,-30.25 J16.17@67.14,-28 70.14,-25 82,-25 v1(86.75,-20.25)
  Bottom Layer w0.3: U13.6@84.3,-19.5 86,-19.5 v1(86.75,-20.25)
I14: J16.18 R44.1 U14.6 | length 35.1
  Top Layer w0.3: R44.1@74,-31.5 72.75,-30.25 71.93,-30.25 J16.18@69.68,-28 71.93,-25.75 82.75,-25.75 87.9,-20.6 v1(87.9,-19)
  Bottom Layer w0.3: v1@87.8,-18.8 87.8,-18 88.75,-17.05 88.75,-14.75 89.75,-13.75 U14.6@90.3,-13.75
I15: J16.25 R45.1 U15.6 | length 42.1
  Top Layer w0.3: R45.1@87.75,-31.5 87.46,-31.21 J16.25@87.46,-28 91.96,-23.5 93.25,-23.5 94.25,-22.5 94.25,-20.25 94.75,-19.75 116.75,-19.75 v1(117.75,-20.75)
  Bottom Layer w0.3: v1(117.75,-20.75) 119.7,-20.75 U15.6@120.5,-19.95
I16: J16.26 R46.1 U16.6 | length 42.3
  Top Layer w0.3: J16.26@90,-28 90,-31.25 R46.1@90.25,-31.5
  Bottom Layer w0.3: J16.26@90,-28 95.75,-22.25 123.5,-22.25 124.75,-21 U16.6@124.75,-19.95
I17: J16.27 R47.1 U17.6 | length 44.1
  Top Layer w0.3: J16.27@92.54,-28 92.54,-31.29 R47.1@92.75,-31.5
  Bottom Layer w0.3: J16.27@92.54,-28 97.54,-23 127.25,-23 129,-21.25 U17.6@129,-19.95
I18: J16.28 R48.1 U18.6 | length 45.7
  Top Layer w0.3: J16.28@95.08,-28 95.08,-31.33 R48.1@95.25,-31.5
  Bottom Layer w0.3: J16.28@95.08,-28 99.48,-23.6 130.65,-23.6 133.25,-21 U18.6@133.25,-19.95
I19: J16.29 R49.1 U19.6 | length 47.2
  Top Layer w0.3: J16.29@97.62,-28 97.62,-31.37 R49.1@97.75,-31.5
  Bottom Layer w0.3: J16.29@97.62,-28 101.37,-24.25 131.75,-24.25 134.109,-21.891 134.5,-21.5 136.75,-21.5 137.5,-20.75 U19.6@137.5,-19.95
I20: J16.30 R50.1 U20.6 | length 52.2
  Top Layer w0.3: J16.30@100.16,-28 100.16,-31.41 R50.1@100.25,-31.5
  Bottom Layer w0.3: 102.455,-25.705 J16.30@100.16,-28 103.16,-25 132,-25 134.9,-22.1 140.4,-22.1 141.75,-20.75 U20.6@141.75,-19.95
I21: J16.31 R51.1 U21.6 | length 50.9
  Top Layer w0.3: J16.31@102.7,-28 102.75,-28.05 R51.1@102.75,-31.5
  Bottom Layer w0.3: J16.31@102.7,-28 104.95,-25.75 132.5,-25.75 135.5,-22.75 144.5,-22.75 146,-21.25 U21.6@146,-19.95
I22: J16.32 R52.1 U22.6 | length 52.2
  Top Layer w0.3: J16.32@105.24,-28 105.25,-28.01 R52.1@105.25,-31.5 ; v1(134.75,-25.5) 137.5,-22.75 147.25,-22.75 v1(147.75,-22.25)
  Bottom Layer w0.3: J16.32@105.24,-28 106.74,-26.5 133.75,-26.5 v1(134.75,-25.5) ; v1(147.75,-22.25) 148.5,-22.25 150.25,-20.5 U22.6@150.25,-19.95
I_LED1: JP1.3 U1.3 | length 16.2
  Bottom Layer w0.3: U1.3@21,-16.04 22.5,-17.54 22.5,-19.75 24.75,-22 26.75,-22 27.25,-21.5 27.25,-20.25 27.75,-19.75 29.75,-19.75 31,-21 JP1.3@31.29,-21
I_LED2: JP1.2 U2.3 | length 4.9
  Bottom Layer w0.3: U2.3@26.46,-20.79 U2.3@25.75,-20.79 25.75,-20.5 27.75,-18.5 28.75,-18.5 JP1.2@28.75,-18.46
I_LED3: JP1.5 U3.3 | length 7.7
  Bottom Layer w0.3: U3.3@29.75,-16.04 30,-16.29 30,-19 30.75,-19.75 32.58,-19.75 JP1.5@33.83,-21
I_LED4: JP1.4 U4.3 | length 8.2
  Bottom Layer w0.3: JP1.4@31.29,-18.46 32.75,-17 37.54,-17 U4.3@38.5,-16.04
I_LED5: JP1.7 U5.3 | length 13.7
  Bottom Layer w0.3: JP1.7@36.37,-21 37.62,-19.75 44.5,-19.75 45.25,-19 45.25,-17.75 46.96,-16.04 U5.3@47.25,-16.04
I_LED6: JP1.6 U6.3 | length 26.4
  Top Layer w0.3: JP1.6@33.83,-18.46 39.84,-12.45 v1(52.25,-12.45)
  Bottom Layer w0.3: v1(52.25,-12.45) U6.3@55.84,-16.04 ; U6.3@55.54,-16.04 U6.3@56,-16.04
I_LED7: JP1.9 U7.3 | length 25.7
  Bottom Layer w0.3: JP1.9@38.91,-21 41.01,-23.1 53.6,-23.1 54.25,-23.75 61.04,-23.75 U7.3@62.75,-22.04
I_LED8: JP1.8 U8.3 | length 36
  Top Layer w0.3: JP1.8@36.37,-18.46 41.33,-13.5 54,-13.5 54.5,-13 65.25,-13 v1(65.75,-13.5)
  Bottom Layer w0.3: v1(65.75,-13.5) 68.54,-16.29 U8.3@68.75,-16.29
I_LED9: JP1.11 U9.3 | length 34.9
  Bottom Layer w0.3: JP1.11@41.45,-21 42.95,-22.5 54,-22.5 54.5,-23 59.75,-23 62,-20.75 63.5,-20.75 64.25,-21.5 64.25,-23 64.75,-23.5 70.54,-23.5 U9.3@72,-22.04
I_LED10: JP1.10 U10.3 | length 43.2
  Top Layer w0.3: JP1.10@38.91,-18.46 38.91,-17.59 42.4,-14.1 54.9,-14.1 55.25,-13.75 64,-13.75 64.75,-14.5 68,-14.5 68.75,-13.75 73,-13.75 v1(75.25,-16)
  Bottom Layer w0.3: v1(75.25,-16) 77.71,-16 U10.3@78,-16.29
I_LED11: JP1.13 U11.3 | length 40.4
  Top Layer w0.3: v1(60,-18) 71,-18 72.75,-19.75 78.05,-19.75 v1(78.3,-19.5)
  Bottom Layer w0.3: JP1.13@43.99,-21 44.5,-21 45.75,-19.75 54.25,-19.75 56,-18 v1(60,-18) ; v1(78.3,-19.5) 80.84,-22.04 U11.3@81.25,-22.04
I_LED12: JP1.12 U12.3 | length 48.8
  Top Layer w0.3: JP1.12@41.45,-18.46 42.91,-17 44.5,-17 45.25,-16.25 72,-16.25 74,-18.25 76.5,-18.25 78.5,-16.25 84,-16.25 v1(84.5,-16.75)
  Bottom Layer w0.3: v1(84.5,-16.75) 86.79,-16.75 U12.3@87.25,-16.29
I_LED13: JP1.15 U13.3 | length 52.5
  Top Layer w0.3: v1(46.53,-24.78) JP1.15@46.53,-21
  Bottom Layer w0.3: v1(46.53,-24.78) 47.56,-23.75 53,-23.75 53.6,-24.35 72.4,-24.35 73.5,-23.25 73.5,-21.25 74,-20.75 76,-20.75 76.25,-21 ; 76.225,-21.025 78.3,-23.1 89.44,-23.1 U13.3@90.5,-22.04
I_LED14: JP1.14 U14.3 | length 56.3
  Top Layer w0.3: JP1.14@43.99,-18.46 45.45,-17 71.5,-17 73.5,-19 76.75,-19 78.75,-17 82.25,-17 83.5,-18.25 86,-18.25 88.25,-16 v1(93.8,-16)
  Bottom Layer w0.3: v1(93.8,-16) 96.21,-16 U14.3@96.5,-16.29
I_LED15: JP2.5 U15.3 | length 33.6
  Top Layer w0.3: v1(115.75,-13) 116.75,-12 122,-12 v3@122.25,-12.25
  Bottom Layer w0.3: JP2.5@98.08,-21 96.75,-19.67 96.75,-17.75 97.25,-17.25 97.75,-17.25 101.75,-13.25 115.5,-13.25 v1(115.75,-13) ; v3@122.25,-12.25 v3(122.25,-12.5) 123.04,-13.29 U15.3@123.04,-13.75
I_LED16: JP2.6 U16.3 | length 34.3
  Top Layer w0.3: v1(117,-13.5) 117.75,-12.75 119.5,-12.75 122.25,-15.5 v3(126.75,-15.5)
  Bottom Layer w0.3: JP2.6@98.08,-18.46 98.08,-18.17 102.25,-14 116.5,-14 v1(117,-13.5) ; v3(126.75,-15.5) 127.29,-14.96 U16.3@127.29,-13.75
I_LED17: JP2.7 U17.3 | length 41.9
  Top Layer w0.3: v1(118.75,-13.75) 118.75,-14.75 121.25,-17.25 129.5,-17.25 v3(131.54,-15.21)
  Bottom Layer w0.3: JP2.7@100.62,-21 99.3,-19.68 99.3,-17.95 102.65,-14.6 117.9,-14.6 v1(118.75,-13.75) ; v3(131.54,-15.21) U17.3@131.54,-13.75
I_LED18: JP2.8 U18.3 | length 40.1
  Top Layer w0.3: JP2.8@100.62,-18.46 103.83,-15.25 118.25,-15.25 121,-18 132.75,-18 v3(135.5,-15.25)
  Bottom Layer w0.3: v3(135.5,-15.25) 135.79,-14.96 U18.3@135.79,-13.75 U18.3@135.75,-13.75
I_LED19: JP2.9 U19.3 | length 46.2
  Bottom Layer w0.3: JP2.9@103.16,-21 101.9,-19.74 101.9,-17.1 103.8,-15.2 121.7,-15.2 123.4,-16.9 138.35,-16.9 140.04,-15.21 U19.3@140.04,-13.75
I_LED20: JP2.10 U20.3 | length 46.3
  Top Layer w0.3: JP2.10@103.16,-18.46 105.62,-16 118,-16 120.65,-18.65 141.1,-18.65 v1(144.25,-15.5)
  Bottom Layer w0.3: v1(144.25,-15.5) 144.29,-15.46 U20.3@144.29,-13.75
I_LED21: JP2.11 U21.3 | length 52
  Bottom Layer w0.3: JP2.11@105.7,-21 104.5,-19.8 104.5,-17.5 106.2,-15.8 121.05,-15.8 122.75,-17.5 146.5,-17.5 148.54,-15.46 U21.3@148.54,-13.75
I_LED22: JP2.12 U22.3 | length 52.3
  Top Layer w0.3: JP2.12@105.7,-18.46 107.41,-16.75 117.75,-16.75 120.25,-19.25 149.25,-19.25 150.965,-17.535 v1(152.5,-16)
  Bottom Layer w0.3: v1(152.5,-16) 152.5,-14.04 U22.3@152.79,-13.75
IN_GND: D1.1 D2.1 D3.1 D4.1 D5.1 D6.1 D7.1 D8.1 D9.1 D10.1 D11.1 D12.1 D13.1 D14.1 D15.1 D16.1 D17.1 D18.1 D19.1 D20.1 D21.1 D22.1 J3.1 J6.1 J9.1 JP2.3 JP2.4 JP2.13 JP2.14 JP2.15 JP2.16 | length 391.6
  Top Layer w0.3: v1(29.5,-11.25) v1(41,-11.25) 45.5,-6.75 J3.1@45.5,-5 ; v1(69.5,-11.25) v1(93,-11.25) 98,-6.25 J6.1@98,-5 ; v3(122,-11) 123,-10 v1(123,-2) ; v3(127.75,-11.25) 128,-11 v1(128,-2)
  Top Layer w0.5: JP2.3@95.54,-21 95.54,-21.54 96.5,-22.5 109.28,-22.5 JP2.15@110.78,-21 ; JP2.4@95.54,-18.46 102.75,-11.25 102.75,-7.25 v4(108.25,-1.75)
  Bottom Layer w0.3: D1.1@16.55,-11.25 13.25,-7.95 13.25,-3.5 14.25,-2.5 43,-2.5 J3.1@45.5,-5 47.1,-6.6 47.1,-10.1 45.95,-11.25 D6.1@45.3,-11.25 ; 18.5,-2.5 18.5,-6 19.3,-6.8 22.05,-6.8 22.3,-7.05 D2.1@22.3,-11.25 ; D3.1@28.05,-11.25 v1(29.5,-11.25) ; D4.1@33.8,-11.25 v1(35.25,-11.25) ; D5.1@39.55,-11.25 v1(41,-11.25) ; 55,-1.75 55,-9.45 58.55,-13 60.8,-13 D8.1@62.55,-11.25 ; D9.1@68.3,-11.25 v1(69.5,-11.25) ; D10.1@74.3,-11.25 v1(75.5,-11.25) ; D11.1@80.05,-11.25 v1(81.25,-11.25) ; D12.1@85.8,-11.25 v1(87,-11.25) ; D13.1@91.55,-11.25 v1(93,-11.25) ; JP2.3@95.54,-21 JP2.4@95.54,-18.46 ; D14.1@97.3,-11.25 98.25,-11.25 99.1,-10.4 99.1,-6.1 J6.1@98,-5 ; v4@108,-1.75 108,-9.95 110.55,-12.5 113.8,-12.5 D16.1@115.05,-11.25 ; JP2.15@110.78,-21 JP2.13@108.24,-21 JP2.14@108.24,-18.46 JP2.16@110.78,-18.46 ; D17.1@120.8,-11.25 121.75,-11.25 v3(122,-11) ; D18.1@126.55,-11.25 v3(127.75,-11.25) ; D19.1@132.3,-11.25 133.25,-11.25 134.75,-9.75 134.75,-7 133,-5.25 133,-2 ; 137.75,-2 138,-2.25 138,-5 140.25,-7.25 140.25,-10.25 139.25,-11.25 D20.1@138.05,-11.25 ; 143,-2 143,-5.75 144,-6.75 145.25,-6.75 145.75,-7.25 145.75,-10.25 144.75,-11.25 D21.1@143.8,-11.25 ; D22.1@149.55,-11.25 150.5,-11.25 151.25,-10.5 151.25,-5.75 J9.1@150.5,-5
  Bottom Layer w2: J3.1@45.5,-5 48.5,-2 95.25,-2 98,-4.75 100.75,-2 148.75,-2 150.5,-3.75 J9.1@150.5,-5
INPUT_9: J4.1 R9.2 | length 5.1
  Bottom Layer w0.5: J4.1@68,-5 69.25,-5 70.2,-5.95 R9.2@70.2,-8.5
LED1: J17.8 R29.2 | length 5.2
  Top Layer w0.3: R29.2@42.25,-59.65 42.25,-61.97 J17.8@44.28,-64
LED24A: JP1.1 R23.1 | length 15.6
  Top Layer w0.3: R23.1@21.75,-21.5 v2(24.5,-24.25)
  Bottom Layer w0.3: v2(24.5,-24.25) 26.25,-26 29.25,-26 30.5,-24.75 30.5,-23.25 28.75,-21.5 JP1.1@28.75,-21
NetC3_1: C3.1 C8.1 D23.2 R23.2 U24.8 | length 26.6
  Top Layer w0.5: C3.1@15.29,-30.25 17,-30.25 17.75,-31 U24.8@17.75,-32.15
  Top Layer w1: C3.1@15.29,-30.25 14.5,-29.46 14.5,-26.29 15.29,-25.5 C8.1@15.29,-24.5 17.5,-24.5 19.5,-22.5 19.5,-20 20.8,-18.7 R23.2@21.75,-18.7 18.75,-15.7 D23.2@17,-15.7
NetC6_1: C6.1 R25.2 | length 2.8
  Bottom Layer w0.5: R25.2@17.5,-28.3 17.55,-28.25 C6.1@20.25,-28.25
NetC6_2: C6.2 C7.2 U24.4 | length 17.9
  Top Layer w0.5: U24.4@21.56,-37.75 v5(23.25,-37.75)
  Bottom Layer w0.5: C6.2@20.25,-26.35 23.85,-26.35 24.5,-27 24.5,-37.25 24,-37.75 v5(23.25,-37.75)
NetD1_2: D1.2 R1.1 U1.1 | length 5.8
  Bottom Layer w0.3: D1.2@20,-11.25 20,-12.5 U1.1@21,-13.5
  Bottom Layer w0.5: D1.2@20,-11.25 20.75,-10.5 20.75,-8.75 R1.1@21,-8.5
NetD2_2: D2.2 R2.1 U2.1 | length 12
  Bottom Layer w0.4: U2.1@25.75,-18.25 26.25,-18.25 27.75,-16.75 27.75,-14 25.75,-12 D2.2@25.75,-11.25
  Bottom Layer w0.5: D2.2@25.75,-11.25 25.75,-9.25 R2.1@26.5,-8.5
NetD3_2: D3.2 R3.1 U3.1 | length 6.1
  Bottom Layer w0.3: U3.1@29.75,-13.5 29.75,-13 D3.2@31.5,-11.25 ; D3.2@31.375,-11.125 D3.2@31.5,-11
  Bottom Layer w0.5: D3.2@31.5,-11.25 31.5,-9 R3.1@32,-8.5
NetD4_2: D4.2 R4.1 U4.1 | length 5.6
  Bottom Layer w0.3: D4.2@37.25,-11.25 37.25,-12.25 U4.1@38.5,-13.5
  Bottom Layer w0.5: D4.2@37.25,-11.25 37.25,-8.75 R4.1@37.5,-8.5